# Altium PCB PCB1.PcbDoc
Units mil, origin at the board's own origin, x right, y up, seen from the top; angles counter-clockwise.
Board outline 1730 x 750 mil, 6 copper layers (Top Layer, Signal Layer Top, Signal Layer Down, VCC, GND, Bottom Layer), stack 32.112 mil thick; 30 components, 44 nets, 163 pads, 68 vias.
Unrouted connection lines stored in the file: 1.
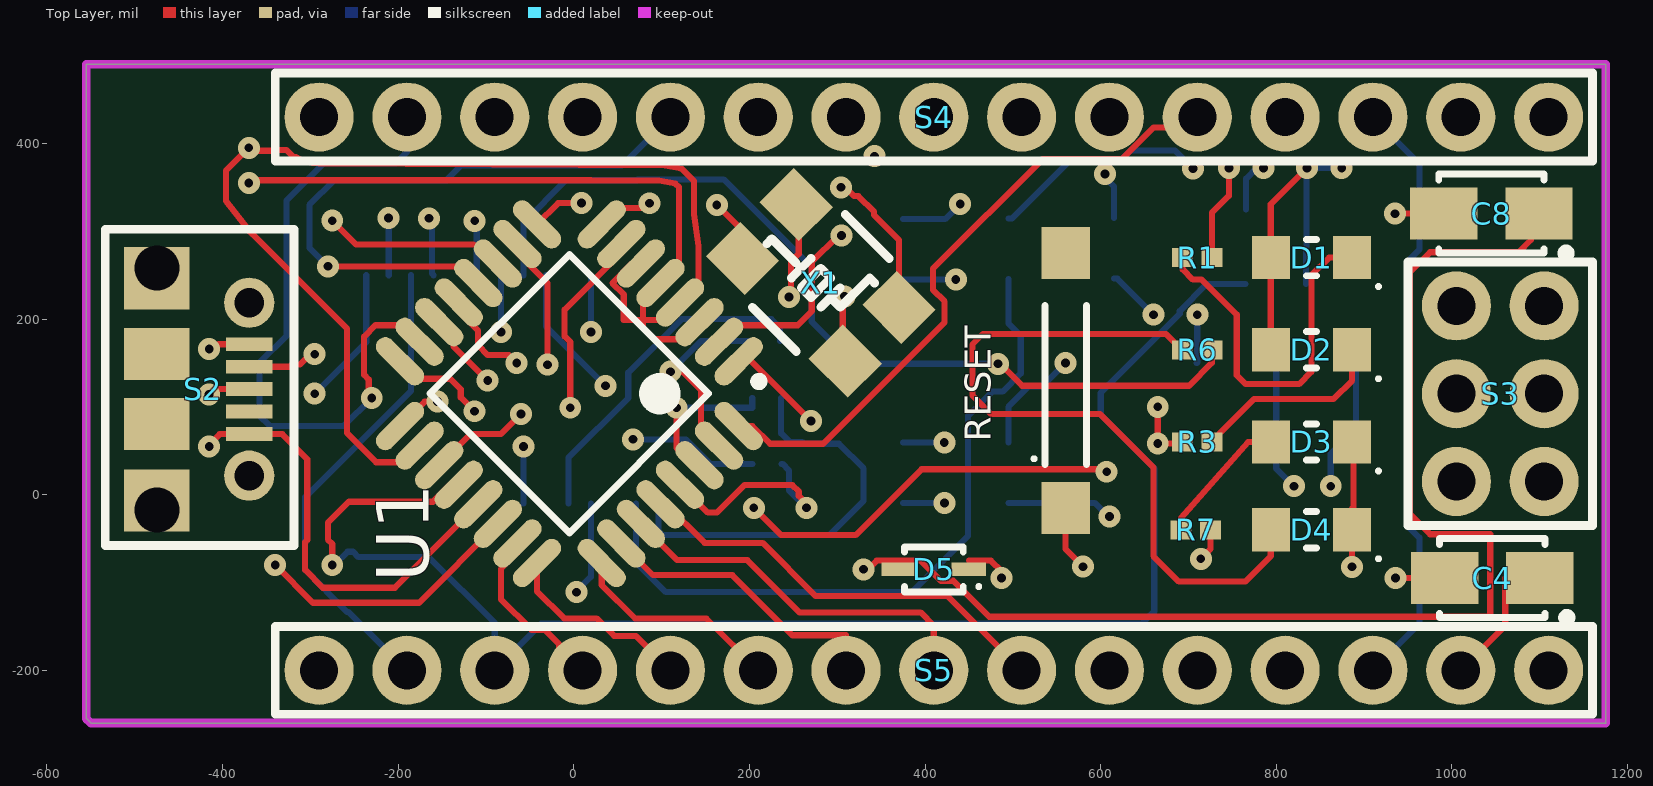
[diagram p0: Top Layer view]
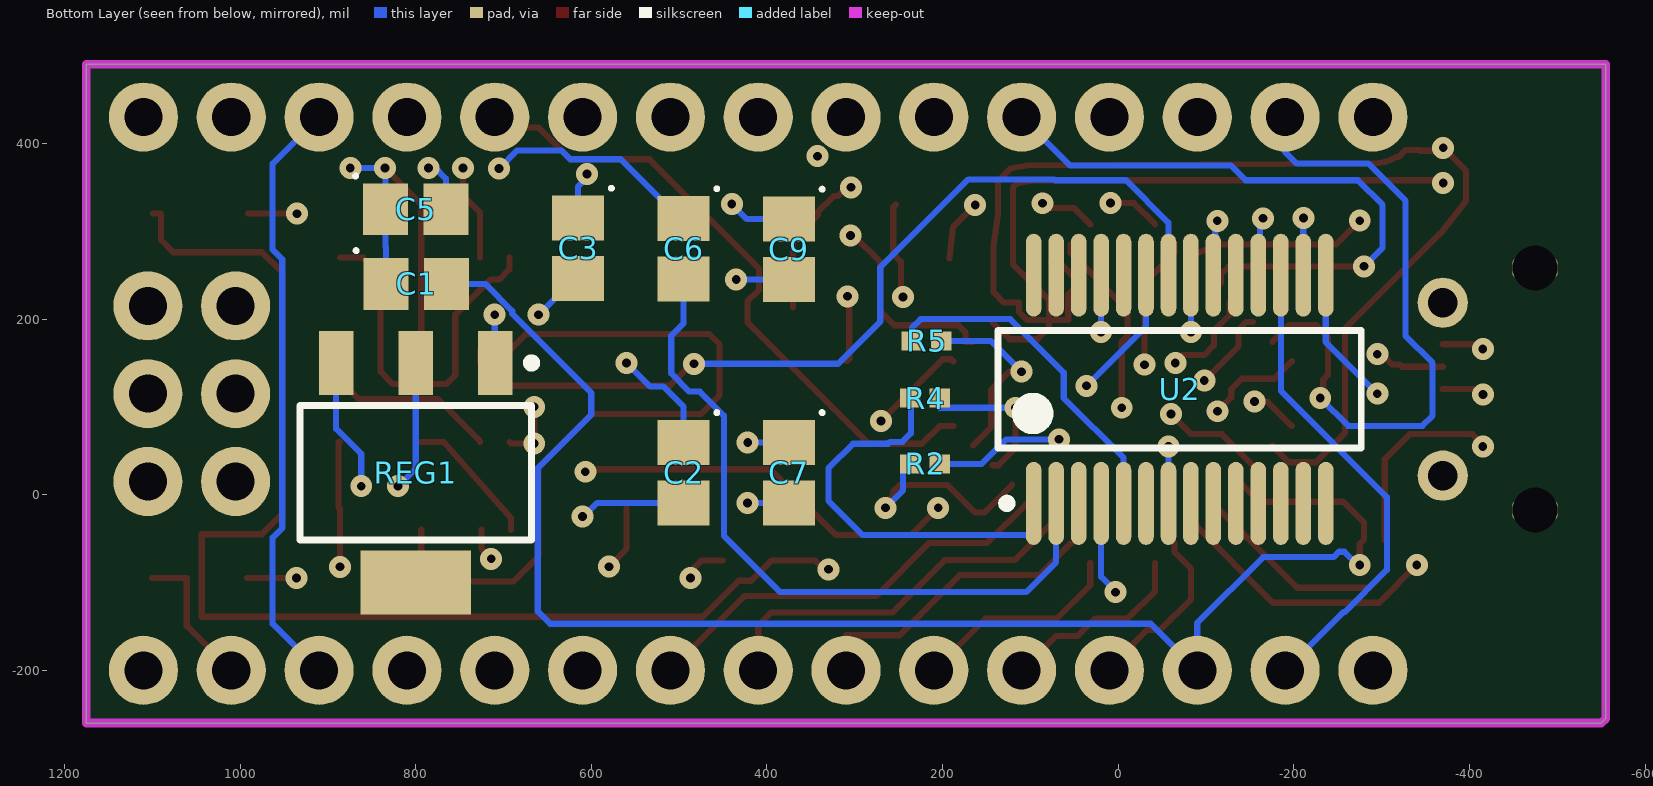
[diagram p1: Bottom Layer view, seen from below]
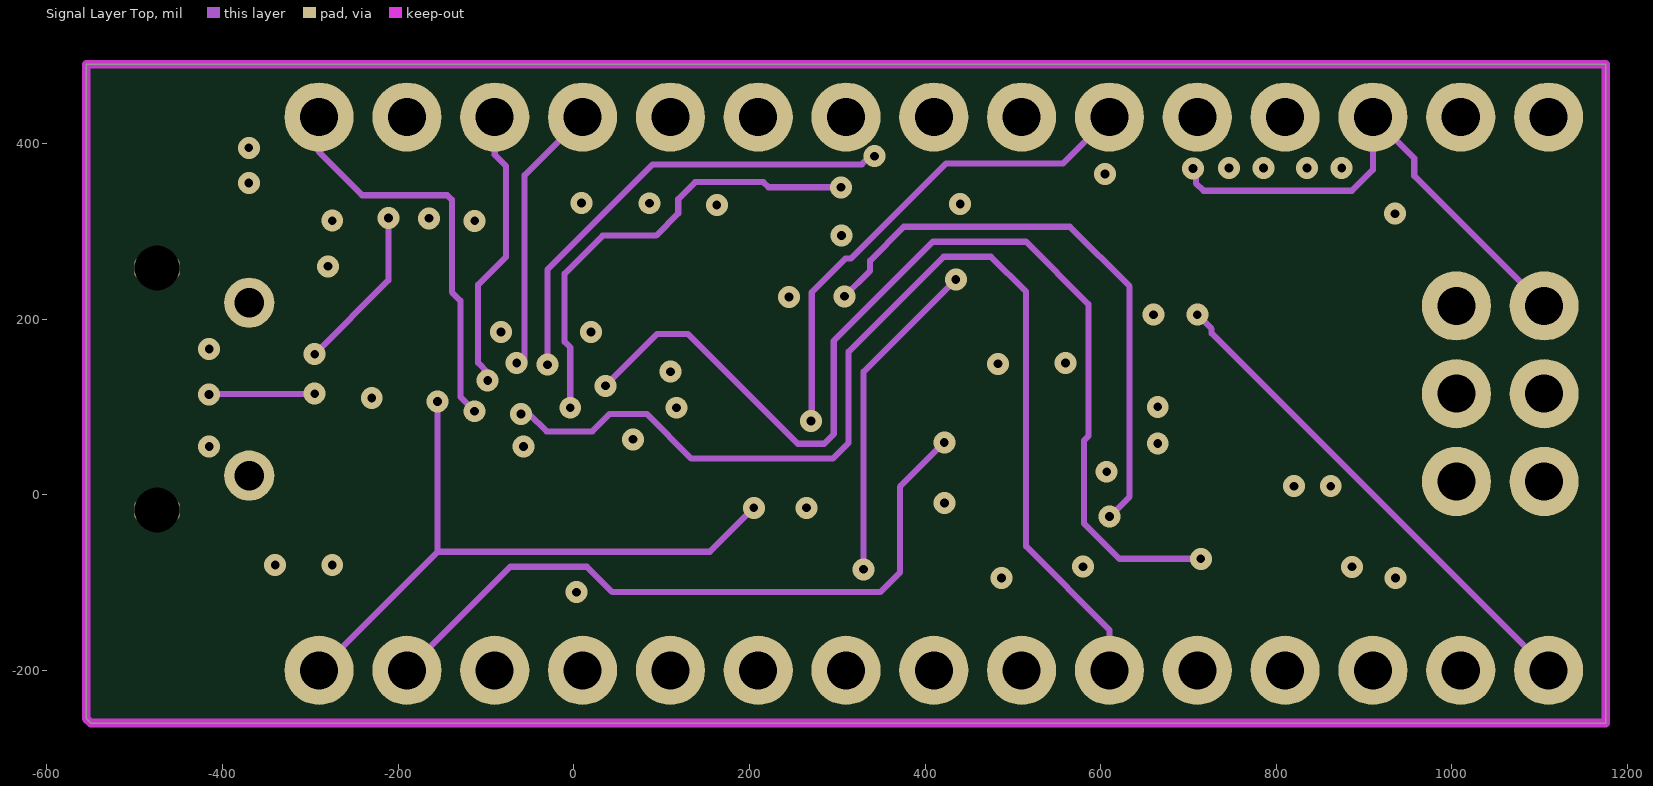
[diagram p2: Signal Layer Top]
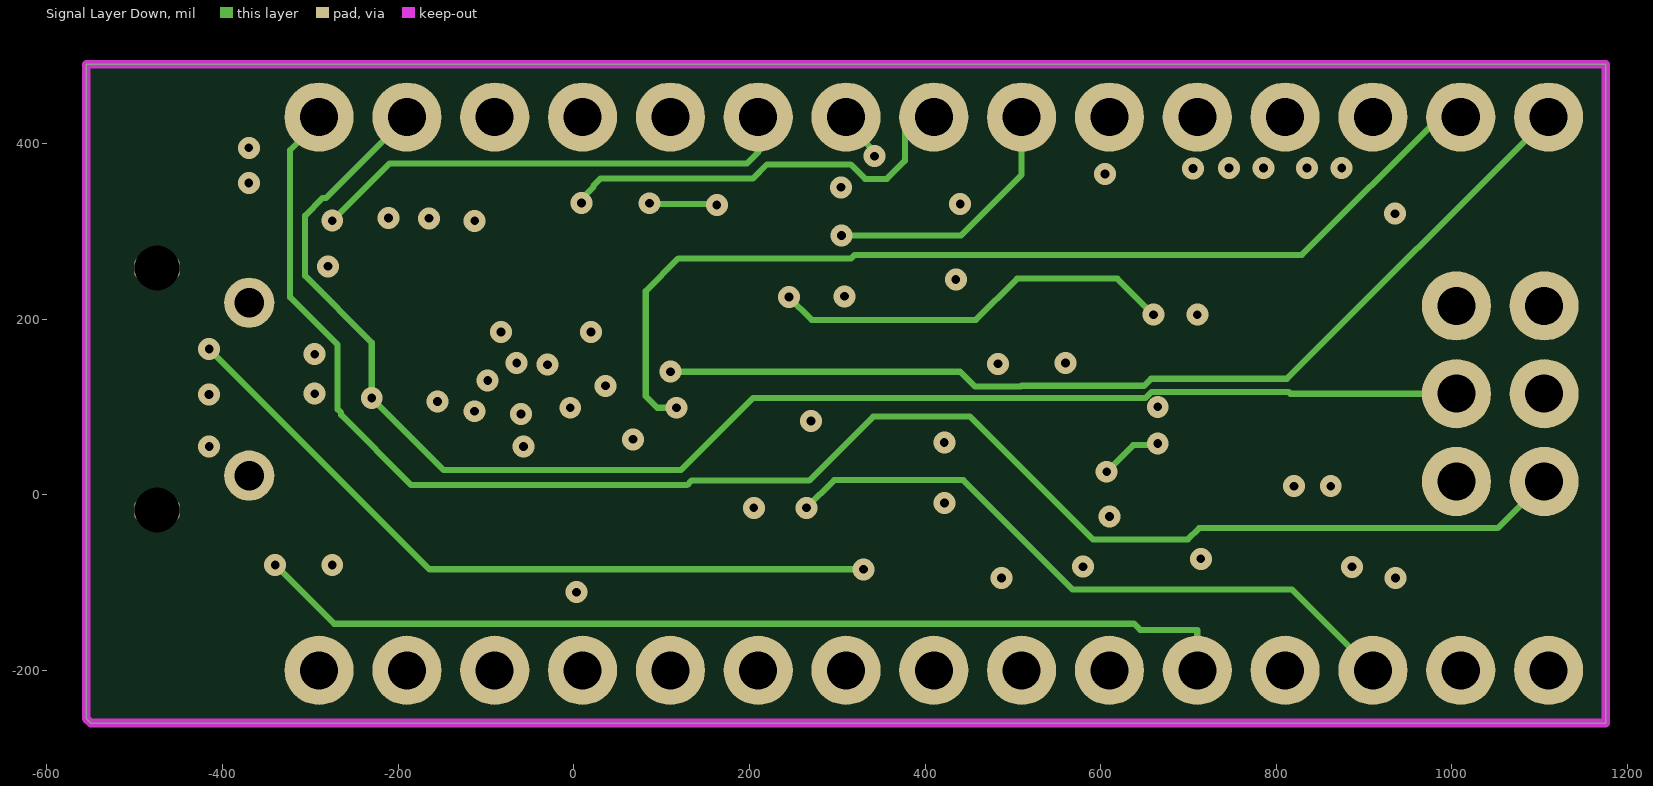
[diagram p3: Signal Layer Down]
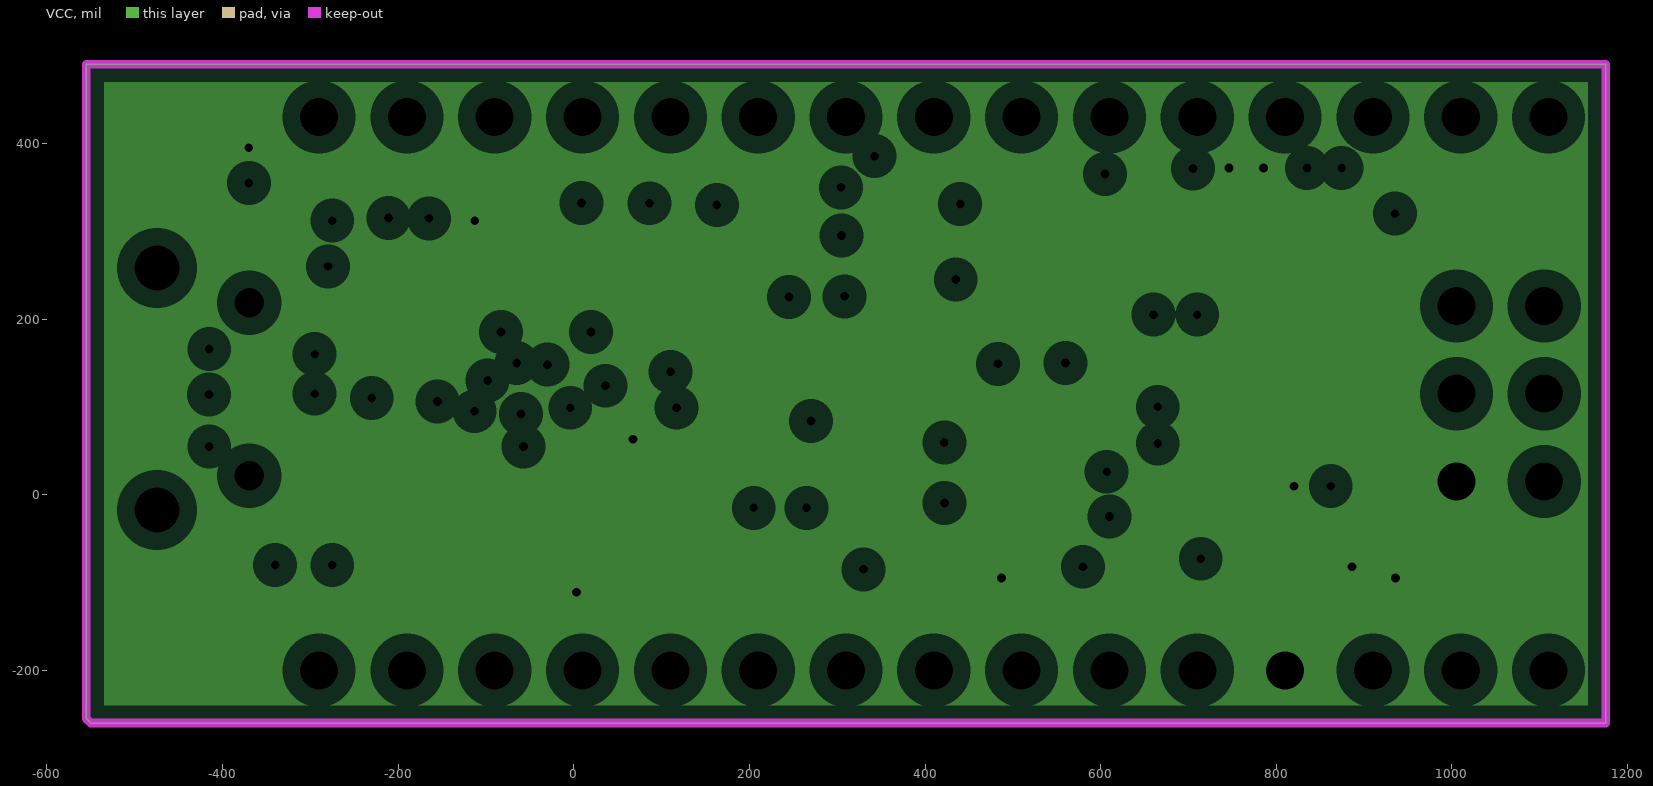
[diagram p4: VCC, clearances drawn from the general rule]
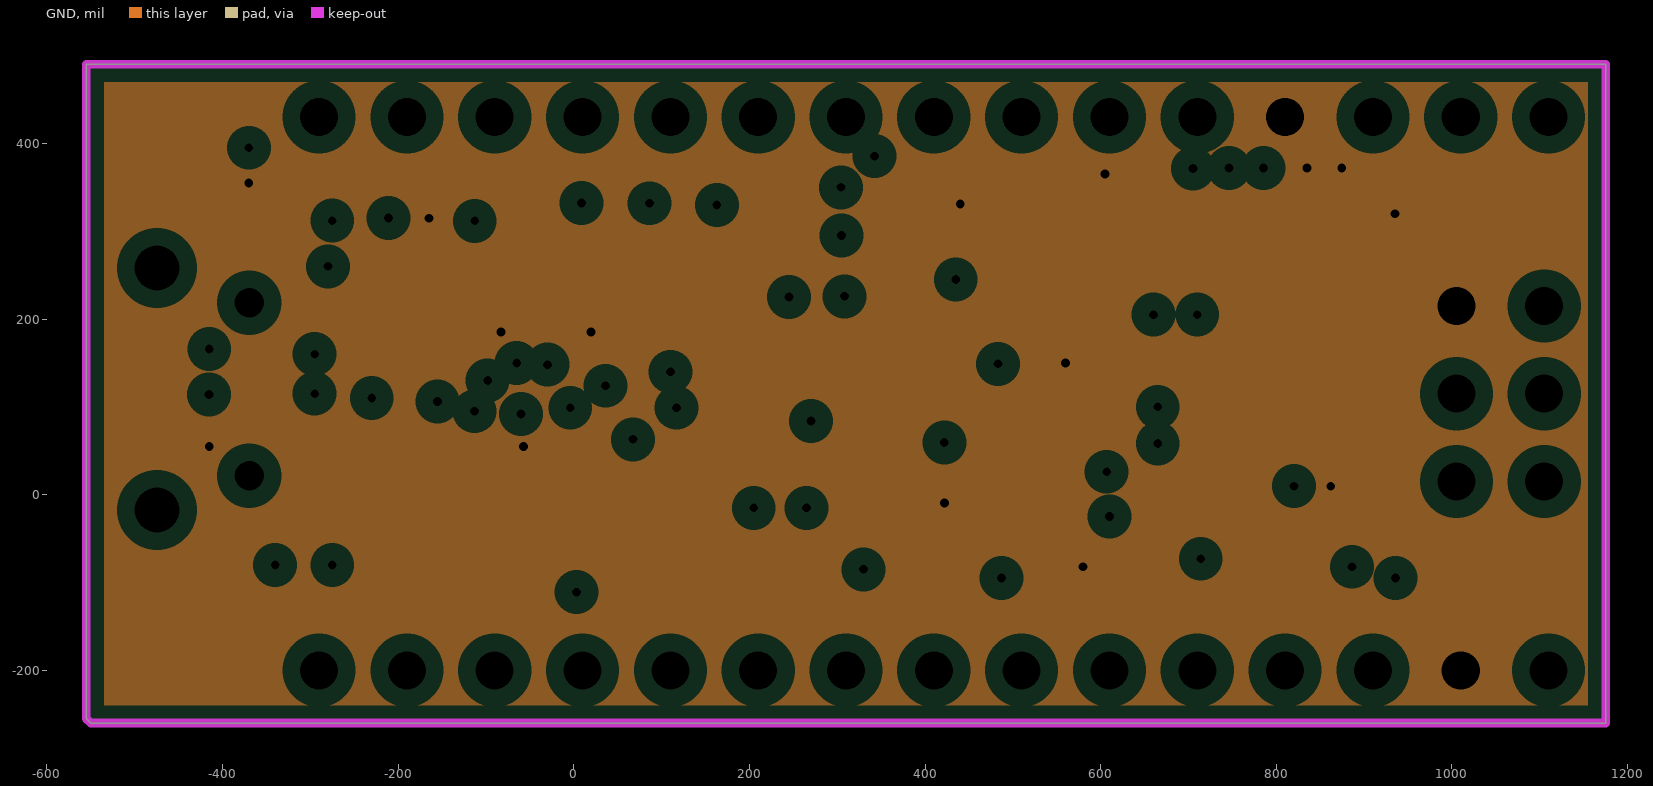
[diagram p5: GND, clearances drawn from the general rule]

## Layer stack, top to bottom
Top Solder: solder mask 0.4, Solder Resist, Dk 3.5
Top Layer: signal copper 1.378
Dielectric 1: prepreg 2.8, PP-006, Dk 4.1
Signal Layer Top: signal copper 1.378
Dielectric 2: prepreg 2.8, PP-006, Dk 4.1
Signal Layer Down: signal copper 1.4
Dielectric 3: dielectric 12.6, FR-4, Dk 4.8
VCC: plane copper 1.378, net +5
Dielectric 5: prepreg 2.8, PP-006, Dk 4.1
GND: plane copper 1.378, net GND
Dielectric 4: prepreg 2.8, PP-006, Dk 4.1
Bottom Layer: signal copper 1.4
Bottom Solder: solder mask 0.4, Solder Resist, Dk 3.5

## Board outline
1175,-260 -550,-260 -555,-255 -555,490 1175,490

## Design rules (kind name [scope] priority, off if disabled: settings)
Clearance [All] p1: gap=7 ignorepadtopadclearanceinfootprint=TRUE except(1: Arc-SMDPad Arc-THPad Arc-Via Arc-Fill Arc-Poly Arc-Region Track-SMDPad Track-THPad Track-Via Track-Fill Track-Poly Track-Region; 4: Arc-Arc Arc-Track Arc-Text Arc-Hole Track-Track Track-Text Track-Hole; 10: Text-Text Text-Hole)
PlaneClearance [All] p1: clearance=20
PlaneConnect [All] p1: planeconnectstyle=Relief reliefexpansion=20 reliefentries=4 reliefconductorwidth=10 reliefairgap=10
PolygonConnect [All] p1: connectstyle=Relief reliefconductorwidth=10 reliefentries=4 polygonreliefangle="90 Angle" airgapwidth=10
RoutingVias [All] p1: holewidth=10 width=25 viastyle="Through Hole" minholewidth=10 minwidth=25 maxholewidth=10 maxwidth=25
SolderMaskExpansion [All] p1: expansion=4 istentingtop=FALSE
SupplyNets "Schematic Supply Nets_4" [InNet('VUSB')] p1: voltage=0.000
SupplyNets "Schematic Supply Nets_3" [InNet('3V3')] p2: voltage=0.000
SupplyNets "Schematic Supply Nets_2" [InNet('VCC')] p3: voltage=0.000
SupplyNets "Schematic Supply Nets_1" [InNet('GND')] p4: voltage=0.000
SupplyNets "Schematic Supply Nets" [InNet('+5')] p5: voltage=0.000
Width [All] p1: maxlimit=10 minlimit=7 preferedwidth=7 minimp=50.000000 maximp=50.000000 favimp=50.000000
28 further rules are at their usual default settings.

## Components (designator, comment, footprint, x,y, rotation, side; value= is the part's Value field where it differs from the comment)
C1 "100nF Ceramic Multilayer Capacitor_1" CAPCP2012X09N 799.45,240 r180 bottom
C2 "C0805C180J5GACTU" CAPCP2012X09N 495,25 r270 bottom
C3 "C0805C180J5GACTU" CAPCP2012X09N 615,280.55 r270 bottom
C4 "Capacitor SMT Tantalum" "CASE A - 3216X18" 1045.87,-95 r180 top value=4.7µF
C5 "100nF Ceramic Multilayer Capacitor_1" CAPCP2012X09N 800,325 r180 bottom
C6 "100nF Ceramic Multilayer Capacitor_1" CAPCP2012X09N 495,280 r270 bottom
C7 "100nF Ceramic Multilayer Capacitor_1" CAPCP2012X09N 375,25 r270 bottom
C8 "Capacitor SMT Tantalum" "CASE A - 3216X18" 1045,320 r180 top value=4.7µF
C9 "100nF Ceramic Multilayer Capacitor_1" CAPCP2012X09N 375,279.45 r270 bottom
D1 "Kingbright Blue LED, 60 mcd 120 ° 0805" LED1913X12NBLUE 840,270 r180 top
D2 "Kingbright Red LED, 100 mcd 120 ° 0805" LED1913X12NRED 840,165 r180 top
D3 "Kingbright Red LED, 100 mcd 120 ° 0805" LED1913X12NRED 840,60 r180 top
D4 "Kingbright Red LED, 100 mcd 120 ° 0805" LED1913X12NRED 840,-40 r180 top
D5 "Panasonic DB2J20900L Schottky Diode, 0.5A, 20V, 2.4ns, 2-Pin SMini2 F5 B" DIOM1712X07N 410,-85 r180 top
R1 "RC0402JR-070RL" RESC1005X40X25NL05T10 710,270 r180 top value=330
R2 "RC0402JR-070RL" RESC1005X40X25NL05T10 220,35 r180 bottom value=1K
R3 "RC0402JR-070RL" RESC1005X40X25NL05T10 710,60 r180 top value=330
R4 "RC0402JR-070RL" RESC1005X40X25NL05T10 220,110 r180 bottom value=1K
R5 "RC0402JR-070RL" RESC1005X40X25NL05T10 218.27,175 r180 bottom value=1K
R6 "RC0402JR-070RL" RESC1005X40X25NL05T10 710,165 r180 top value=330
R7 "RC0402JR-070RL" RESC1005X40X25NL05T10 708.27,-40 r180 top value=330
REG1 "LM1117MP-5.0/NOPB, Low Dropout Voltage Regulator, 1.5A, 5 V ±1%, 4-Pin SOT-223" SOT230P700X180-4N 800,25 r270 bottom
RESET "Button Tactile Switch, NO 0.05 A 0.8mm" Button8014X17N 560,125 r90 top (schematic designator S1)
S2 "NewMolex Right Angle SMT Female Type B Micro USB Connector, 30 V ac, 1.8A" MicroUSB -369.57,168.58 r270 top
S3 "Programming Headers Dual Row" "ISP HEADER" 550,-680 r90 top
S4 "connector;str header;single row;.1 cont centers;.095 tail;gold or gtx;36 contact" Header 1110,430 r180 top
S5 "connector;str header;single row;.1 cont centers;.095 tail;gold or gtx;36 contact" Header 1110,-200 r180 top
U1 "ATMEGA328P-AU" TQFP80P900X900X120-32N -5,115 r225 top
U2 "FT232RL, Universal Asynchronous Receiver & Transmitter 3MBd, 28-Pin, SSOP" SOP65P780X200-28N -70,120 r90 bottom
X1 "Aker 16MHz Crystal SMT" "Aker S5C Crystal" 370.33,213.3 r315 top value=16MHz

## Footprints (in the part's own frame and the unit in brackets; to place one, negate y for a bottom-side part, rotate by r counter-clockwise, add the part's x,y. Pads: shape width x height; smd on the part's side, far side on the other; paste and mask are expansions set on the pad)
"Aker S5C Crystal" [mm]
  rect 1.6x1.4 smd: 1(0,0) 2(-4.2,0) 3(0,-2.2) 4(-4.2,-2.2)
  round 0.254 on Top Overlay: 5(-3,-2.4)
  silkscreen extent -4,-3 -1,0.8, body extent -4.7,-2.8 0.5,0.6, height 1
Button8014X17N [mm] "Chip Inductor, 2-Leads, Body 8.00x1.40mm, IPC Medium Density"
  rect 1.5x1.4 smd: 1(-3.556,0) 2(3.81,0)
  silkscreen extent -2.3,-0.6 2.3,0.96, body extent -3.79,-1.92 4.21,1.78, height 2.5
CAPCP2012X09N [mm] "Chip Capacitor, 2-Leads, Body 2.00x1.25mm, IPC Medium Density"
  rect 1.3x1.5 smd: 1(-0.875,0) 2(0.875,0)
  silkscreen extent -1.79,0.91 -1.69,1.01, body extent -1.05,-0.57 0.95,0.68, height 0.78
"CASE A - 3216X18" [mm] "Molded Capacitor, 2-Leads, Body 3.2x1.6mm, IPC Medium Density"
  rect 1.95x1.5 smd: 1(-1.375,0) 2(1.375,0)
  silkscreen extent -2.28,-1.14 1.52,1.27, body extent -1.52,-0.76 1.65,0.84, height 1.77
DIOM1712X07N [mm] "Molded Diode, 2-Leads, Body 1.70x1.25mm, IPC Medium Density"
  rect 1x0.4 smd: 1(-1.016,0) 2(1.016,0)
  silkscreen extent -1.35,-0.65 0.85,0.65, body extent -0.9,-0.45 0.9,0.45, height 0.8
Header [mm] "SIL Header"
  round 2 hole 1.1: 1(0,0) 2(2.54,0) 3(5.08,0) 4(7.62,0) 5(10.16,0) 6(12.7,0) 7(15.24,0) 8(17.78,0) 9(20.32,0) 10(22.86,0) 11(25.4,0) 12(27.94,0) 13(30.48,0) 14(33.02,0) 15(35.56,0)
  silkscreen extent -1.27,-1.27 36.83,1.27, body extent -1.33,-1.35 36.93,1.35, height 8.6
"ISP HEADER" [mm] "SIL Header for programming"
  round 2 hole 1.1: 1(17.653,-14.097) 2(17.653,-11.557) 3(20.193,-14.097) 4(20.193,-11.557) 5(22.733,-14.097) 6(22.733,-11.557)
  silkscreen extent 16.38,-15.49 24,-10.16, body extent 16.38,-15.37 24,-10.29, height 8
LED1913X12NBLUE [mm] "LED 2-Leads, Body 1.90x1.32mm, IPC Medium Density"
  rect 1.1x1.25 smd: 1(-1.175,0) 2(1.175,0)
  silkscreen extent -1.99,-0.53 0.15,0.89, body extent -1,-0.62 1.02,0.62, height 1.1
LED1913X12NRED [mm] "LED 2-Leads, Body 1.90x1.32mm, IPC Medium Density"
  rect 1.1x1.25 smd: 1(-1.175,0) 2(1.175,0)
  silkscreen extent -1.99,-0.53 0.15,0.89, body extent -1.02,-0.43 1.04,0.47, height 0.85
MicroUSB [mm] "MicroUSB  Molex 5Pin"
  rect 0.4x1.35 smd: 1(-0.07,0) 2(0.58,0) 3(1.23,0) 4(1.88,0) 5(2.53,0)
  rrect50% 0.6x1.3 hole 1.3: ""(-2.27,-2.667) ""(-2.27,-2.667) ""(4.73,-2.667)
  rect 1.8x1.9 smd: ""(-1.98,-2.678) ""(4.45,-2.678)
  round 1.45 hole 0.85: ""(-1.27,0) ""(3.73,0)
  rect 1.5x1.9 smd: ""(0.218,-2.678) ""(2.242,-2.678)
  silkscreen extent -3.39,-4.17 5.75,1.3, body extent -2.83,-5.32 5.37,0.11, height 2.68
RESC1005X40X25NL05T10 [mm] "Chip Resistor, 2-Leads, Body 1.00x0.50mm, IPC Medium Density"
  rect 0.6x0.55 smd: 1(-0.425,0) 2(0.425,0)
  body extent -0.53,-0.27 0.53,0.28, height 0.4
SOP65P780X200-28N [mm] "SOP, 28-Leads, Body 10.20x5.30mm, Pitch 0.65mm, IPC Medium Density"
  oval 2.4x0.45 smd: 1(-3.3,4.225) 2(-3.3,3.575) 3(-3.3,2.925) 4(-3.3,2.275) 5(-3.3,1.625) 6(-3.3,0.975) 7(-3.3,0.325) 8(-3.3,-0.325) 9(-3.3,-0.975) 10(-3.3,-1.625) 11(-3.3,-2.275) 12(-3.3,-2.925) 13(-3.3,-3.575) 14(-3.3,-4.225) 15(3.3,-4.225) 16(3.3,-3.575) 17(3.3,-2.925) 18(3.3,-2.275) 19(3.3,-1.625) 20(3.3,-0.975) 21(3.3,-0.325) 22(3.3,0.325) 23(3.3,0.975) 24(3.3,1.625) 25(3.3,2.275) 26(3.3,2.925) 27(3.3,3.575) 28(3.3,4.225)
  silkscreen extent -3.42,-5.25 1.7,5.25, body extent -3.91,-5.1 3.91,5.1, height 2
SOT230P700X180-4N [mm] "SOT223, 4-Leads, Body 6.50x7.00mm (avg), Pitch 2.30mm, IPC Medium Density"
  rect 1.85x1 smd: 1(-3.175,2.3) 2(-3.175,0) 3(-3.175,-2.3)
  rect 1.85x3.2 smd: 4(3.175,0)
  silkscreen extent -3.3,-3.35 1.95,3.47, body extent -3.8,-3.12 3.29,3.38, height 1.65
TQFP80P900X900X120-32N [mm] "TQFP, 32-Leads, Body 7.00x7.00mm, Pitch 0.80mm, IPC Medium Density"
  oval 1.75x0.55 smd: 1(-4.125,2.8) 2(-4.125,2) 3(-4.125,1.2) 4(-4.125,0.4) 5(-4.125,-0.4) 6(-4.125,-1.2) 7(-4.125,-2) 8(-4.125,-2.8) 17(4.125,-2.8) 18(4.125,-2) 19(4.125,-1.2) 20(4.125,-0.4) 21(4.125,0.4) 22(4.125,1.2) 23(4.125,2) 24(4.125,2.8)
  oval 0.55x1.75 smd: 9(-2.8,-4.125) 10(-2,-4.125) 11(-1.2,-4.125) 12(-0.4,-4.125) 13(0.4,-4.125) 14(1.2,-4.125) 15(2,-4.125) 16(2.8,-4.125) 25(2.8,4.125) 26(2,4.125) 27(1.2,4.125) 28(0.4,4.125) 29(-0.4,4.125) 30(-1.2,4.125) 31(-2,4.125) 32(-2.8,4.125)
  silkscreen extent -4.25,-2.85 2.85,3.75, body extent -4.44,-4.5 4.56,4.5, height 1.6

## Part data
C1 C5 C6 C7 C9: "AVX 0805 Standard 100nF Ceramic Multilayer Capacitor, 50 V dc X7R Dielectric ±10% SMD", Capacitance=100nF, Manufacturer=AVX, Package=0805, Voltage=50V, Creator="Ritesh Kanjee", Datasheet URL=http://za.rs-online.com/web/p/ceramic-multilayer-capacitors/4646688/, Date Created="18 February 2015", RS Stock No.=464-6688
C2 C3: library part "18pF Ceramic Multilayer Capacitor, 50 V dc C0G Dielectric ±5% SMD", "18pF Ceramic Multilayer Capacitor, 50 V dc C0G Dielectric ±5% SMD", Capacitance=18pF, Manufacturer=Kemet, Package=0805, Voltage=50V, Creator="Ritesh Kanjee", Datasheet URL=http://za.rs-online.com/web/p/ceramic-multilayer-capacitors/6480935/?searchTerm=C0805C180J5GACTU&relevancy-data=636F3D3226696E3D4931384E4B6E6F776E41734D504E266C753D656E266D6D3D6D61746368616C6C7061727469616C26706D3D5E5B5C707B4C7D5C707B4E647D2D2C2F255C2E5D2B2426706F3D313326736E3D592673743D4D414E5F504152545F4E554D4245522677633D424F5448267573743D4330383035433138304A35474143545526, Date Created="18 February 2015", RS Stock No.=648-0935
C4 C8: library part "4.7µF Tant RS 496-3545", "Capacitor,tantalum,SMT,16V,4.7uF,10%,A-case", Package=3216-18, Tolerance=10%, Voltage=16V, ComponentLink1Description="Supplier Website", ComponentLink1URL=http://za.rs-online.com/web/search/searchBrowseAction.html?method=getProduct&R=4963545, ComponentLink2Description="RS Data sheet", ComponentLink2URL=http://docs-europe.origin.electrocomponents.com/webdocs/04ed/0900766b804ed4cc.pdf, LatestRevisionDate=28-April-2010, Part Originator="H Theron", Publisher=DPSS, RS Stock Nr.=496-3545
D1: Color=Blue, Forward Voltage=3.2V, Manufacturer=KingBright, Manufacturer Part No.=KP-2012PBC-A, Creator="Ritesh Kanjee", Datasheet URL=http://za.rs-online.com/web/p/visible-leds/4663784/, Date Created="18 February 2015", RS Stock No.=466-3784
D2 D3 D4: Color=RED, Forward Voltage=1.85V, Manufacturer=KingBright, Manufacturer Part No.=KP-2012SRC-PRV, Creator="Ritesh Kanjee", Datasheet URL=http://za.rs-online.com/web/p/visible-leds/4663813/, Date Created="18 February 2015", RS Stock No.=466-3813
D5: library part "Schottky Diode, 0.5A, 20V, 2.4ns, 2-Pin SMini2 F5 B", Manufacturer=Panasonic, Manufacturer Part No.=DB2J20900L, Maximum Continuous Forward Current=0.5A, Peak Reverse Repetitive Voltage=20V, Created By="R Kanjee", Datasheet=http://docs-europe.electrocomponents.com/webdocs/1398/0900766b813986b3.pdf, Date Created="1 March 2015", RS Stock No.=713-2703
R1 R2 R3 R4 R5 R6 R7: library part CMP-1011-00001-2, Manufacturer="Yageo / Phycomp", Part Number=RC0402JR-070RL
REG1: library part LM1117MP-5.0, Manufacturer="Texas Instruments", Maximum Input Voltage=15V, Output Voltage=5V, Supply Current=1.5Amps, Created By="R Kanjee", Datasheet URL=http://za.rs-online.com/web/p/low-dropout-voltage-regulators/5339583/, Date Created="26 February 2015", RS Stock No.=533-9583
RESET: Manufacturer="C & K", Manufacturer Part No.=B3F1000, Creator="R Kanjee", Date Created="25 February 2015", RS Stock No.=516-255, State="Normaly Open"
S2: library part "Micro USB Connector, 30 V ac, 1.8A", Manufacturer=Molex, Manufacturer Part No.=105017-0001, Max Current=1.8A, Max Voltage=30V, Creator="R Kanjee", Datasheet URL=http://za.rs-online.com/web/p/micro-usb-connectors/8486764/, Date Created="28 February 2015", RS Stock No=848-6764
S3: library part "Programming ISP, Programming Headers Dual Row", Current Rating="3Amps Continuous", Manufacturer=FCI, Manufacturer Part No.=68000-236HLF, Created By="R Kanjee", Date Created="1 March 2015", RS Stock No.=2509565626
S4 S5: library part "Single row; PCB headers", Current Rating="3Amps Continuous", Manufacturer=FCI, Manufacturer Part No.=68000-236HLF, Created By="R Kanjee", Date Created="1 March 2015", RS Stock No.=2509565626
U1: "ATMEGA328P-AU, 8 bit AVR Microcontroller 20MHz 1 kB, 32 kB Flash, 2 kB RAM, I2C 32-Pin TQFP", Company="Lumina Inova", Created By="Ritesh Kanjee", Datasheet URL=http://docs-europe.electrocomponents.com/webdocs/0db4/0900766b80db4deb.pdf, Date Created="14 February 2015", RS Stock No.=696-3092
U2: library part "FT232RL USB to UART, Universal Asynchronous Receiver & Transmitter 3MBd, 28-Pin, SSOP", Manufacturer="FTDI Chip", Manufacturer Part No.=FT232RL, Creator="R Kanjee", Date Created="03 March 2015", Pin Count=28, RS Stock No.=406-580
X1: library part "Aker  C5S-16.000-12-3030-X", "Aker S5C SMT Crystal", Frequency Stability=+/-30ppm, Load Capacitance=12pF, Manufacturer=Aker, Manufacturer Part #=C5S-16.000-12-3030-X, Package="3.2x5mm SMD", Creator="R Kanjee", HelpURL=http://za.rs-online.com/web/p/crystal-units/6719488/, RS="RS 671-9488", RS Stock Nr.=671-9488, Supplier=RS

## Via types
v1: diameter 25, hole 10, Top Layer to Bottom Layer, 68 vias

## Nets (pads, with @x,y where several pads share a name; then routed paths per layer and width w, separated by ;. In a path a pad name is that pad's centre, name@x,y a point inside that pad or via, vN(x,y) a via of type N, cw(c..) or ccw(c..) an arc to the next point about the centre after c; other vN are vias at no path point)
3V3: C7.1 S5.14 U2.17 | length 1396.6
  Signal Layer Top w7: S5.14 -72.08,-82.08 15,-82.08 43.92,-111 349,-111 371.34,-88.66 371.34,8.79 v1(422,59.45)
  Bottom Layer w7: S5.14 -256.33,-133.67 -258.1,-133.67 -306,-85.77 -306,-2.77 -185.16,118.07 U2.17 ; C7.1 v1(422,59.45)
+5: C4.2 C5.2 D3.1 D4.1 D5.1 R1.1 R2.2 REG1.2 S3.2 S5.4 U1.4 U1.6 U1.18 U2.4 U2.20 | length 2223.3
  Top Layer w7: U1.18 -194.35,37 -225,37 -258.09,70.09 -258.09,189.09 -366,297 -366.1,297 -369.32,300.22 -396,334.23 -396,369 v1(-370,395) -366.56,391.56 -343.5,391.56 -342.45,392.62 -327.38,392.62 -319.32,384.55 -317.01,384.55 ccw(c-290,430) -290.29,377.13 103.76,375 122.86,371.18 136.92,357.12 136.92,319.23 142,283.13 142,230.26 130.44,218.7 U1.4 113,218.7 113,208 104,199 57,199 57,228 44.03,240.98 66.29,263.24 U1.6 ; 450,-75 475,-75 487.19,-87.19 v1(487.19,-95) ; R1.1 726.73,321 746,340.27 v1(746,372) ; v1(886.26,-82.11) D4.1 886.26,-16 888,-14.26 888,60 D3.1 ; v1(935.85,-95) C4.2
  Bottom Layer w7: v1(-112.77,311.85) -110.44,309.52 -110.44,251.97 U2.20 ; v1(3,-111) 3,-110.08 19.57,-93.51 U2.4 ; v1(67.54,63) 127.54,63 155.54,35 R2.2 ; C5.2 765.55,360 777.58,372.03 v1(785.55,372.03) ; REG1.2 800,29.67 v1(820,9.67)
A0: S5.12 U1.23 | length 215.4
  Top Layer w7: U1.23 -64.16,-65.65 -83,-84.49 -83,-119 -48,-154 -33,-154 -17,-170 -17,-200 S5.12
A1: S5.11 U1.24 | length 221.4
  Top Layer w7: U1.24 -41.89,-110 -11.05,-140.84 26.07,-140.84 46,-160.77 70.77,-160.77 S5.11
A2: S5.10 U1.25 | length 243.4
  Top Layer w7: U1.25 31.89,-102.89 70,-141 151,-141 S5.10
A3: S5.9 U1.26 | length 339.1
  Top Layer w7: U1.26 90.23,-91.59 180.57,-91.59 248.98,-160 310,-160 S5.9
A4: S5.8 U1.27 | length 432.5
  Top Layer w7: U1.27 117.77,-74.59 197.57,-74.59 256.98,-134 395,-134 410,-149 S5.8
A5: S5.7 U1.28 | length 489.6
  Top Layer w7: U1.28 104.97,-10.97 149,-55 215,-55 275.27,-115.27 425.27,-115.27 S5.7
A6: S5.6 U1.19 | length 1373.2
  Top Layer w7: U1.19 -117.81,69 -83,69 v1(-60,92)
  Signal Layer Top w7: v1(-60,92) -51,92 -31,72 21,72 41,92 83.07,92 134.07,41 295,41 313,59 313,162.92 421.08,271 475,271 515,231 515,-59 610,-154 S5.6
A7: S5.5 U1.22 | length 1435.2
  Top Layer w7: v1(-340,-80) -297,-123 -176.19,-123 U1.22
  Signal Layer Down w7: v1(-340,-80) -273,-147 638,-147 645,-154 710,-154 S5.5
AREF: C1.2 S5.13 U1.20 | length 1767
  Top Layer w7: v1(-275,-80) -275,-56.06 -280,-51.06 -280,-32 -256,-8 -160.41,-8 -141.11,11.3 U1.20
  Bottom Layer w7: v1(-275,-80) -272.47,-80 -257.47,-65 -251.27,-65 -245.27,-71 -165,-71 -90,-146 S5.13 -37,-147 647,-147 661,-133 661,29.96 600,90.96 600,115.96 689.98,205.94 689.98,209.02 720.96,240 C1.2
D0/Rx: R4.2 S4.2 U1.30 | length 1347.9
  Top Layer w7: v1(117,99) 117,53 136.43,33.57 U1.30
  Signal Layer Down w7: v1(117,99) 95,99 82,112 82,231.9 119.1,269 315.77,269 319.77,273 829,273 986,430 S4.2
  Bottom Layer w7: v1(117,99) 203.27,99 R4.2
D1/Tx: R5.2 S4.1 U1.31 | length 1355.6
  Top Layer w7: v1(110,140) 124,140 145,119 145,76.35 U1.31
  Signal Layer Down w7: v1(110,140) 440,140 457,123 509,123 510,124 649.4,124 657.4,132 812,132 S4.1
  Bottom Layer w7: v1(110,140) 145,175 R5.2
D2: S4.5 U1.32 | length 739.1
  Top Layer w7: U1.32 203.46,78.11 223.57,58 284,58 422.21,196.21 422.21,220.12 409,233.33 409,257.23 533.77,382 624.04,382 660.13,418.09 698.09,418.09 S4.5
D3: S4.6 U1.1 | length 680.7
  Top Layer w7: U1.1 190.16,154.26 199.74,154.26 v1(270,84)
  Signal Layer Top w7: v1(270,84) 271,85 271,230.3 309.7,269 315.77,269 423.77,377 557,377 S4.6
D4: S4.7 U1.2 | length 528.1
  Top Layer w7: U1.2 174,174.16 174,185 182,193 255,193 271.01,209.01 271.01,265.01 301,295 v1(305,295)
  Signal Layer Down w7: v1(305,295) 440.77,295 510,364.23 S4.7
D5: S4.8 U1.9 | length 549.3
  Top Layer w7: U1.9 -17.67,332 v1(8.97,332)
  Signal Layer Down w7: v1(8.97,332) 8.97,336.87 22.31,350.21 22.31,351.98 30.33,360 204.04,360 220.04,376 315.19,376 331.71,359.48 356.38,359.48 377,380.1 377,430 S4.8
D6: S4.9 U1.10 | length 743.9
  Top Layer w7: U1.10 -64.16,275.38 -30,241.22 v1(-30,148)
  Signal Layer Top w7: v1(-30,148) -30,256.26 89.74,376 328.13,376 337.61,385.48 v1(342.48,385.48)
  Signal Layer Down w7: S4.9 310,422.83 342.48,390.35 v1(342.48,385.48)
D7: S4.10 U1.11 | length 769.5
  Top Layer w7: v1(-275,312) -248,285 -114.28,285 -86.43,273.38 U1.11
  Signal Layer Down w7: v1(-275,312) -210,377 197,377 210,390 S4.10
D8: S4.11 U1.12 | length 716.2
  Top Layer w7: v1(-280,260) -279.73,259.73 -125.73,259.73 -117,251 -117,240.97 U1.12
  Bottom Layer w7: v1(-280,260) -301,281 -301,330 -273,358 -145.08,358 -128.08,375 55,375 S4.11
D9: S4.12 U1.13 | length 428.7
  Top Layer w7: U1.13 -127,218.7 -127,204.59 -109,186.59 -109,170 -98,159 -74,159 v1(-65,150)
  Signal Layer Top w7: v1(-65,150) -56,150 -56,364 S4.12
D10: S4.13 U1.14 | length 417.1
  Top Layer w7: U1.14 -145.43,196.43 -137,188 -137,169 v1(-98,130)
  Signal Layer Top w7: v1(-98,130) -98,139 -109,150 -109,239 -77,271 -77,374 -90,387 S4.13
D11/MOSI: S3.4 S4.14 U1.15 | length 2462.2
  Top Layer w7: v1(-230,110) -233.44,113.44 -233.44,131.13 -238.82,136.5 -238.82,180 -225.82,193 -194.35,193 U1.15
  Signal Layer Down w7: S4.14 -282,338 -285.77,338 -306,317.77 -306,249.23 -230,173.23 v1(-230,110) -148,28 122,28 204,110 650.96,110 657.96,117 813.91,117 815.91,115 S3.4
  Bottom Layer w7: v1(-230,110) -261.77,78.23 -346.23,78.23 -358,90 -358,150 -327,181 -327,335 -285,377 -203,377 -190,390 S4.14
D12/MISO: S3.1 S4.15 U1.16 | length 2476.4
  Top Layer w7: U1.16 -177.9,132 -140.75,132 -128.75,120 -128.75,110.75 v1(-113,95)
  Signal Layer Top w7: S4.15 -290,390 -241,341 -144,341 -138.77,335.77 -138.77,230.7 -129,220.94 -129,111.53 -113,95.53 v1(-113,95)
  Signal Layer Down w7: S4.15 -290,425.47 -323,392.47 -323,224.77 -269,170.77 -269,97.23 -265,93.23 -265,91 -185,11 129.04,11 134.04,16 268,16 341,89 451.25,89 591.25,-51 699.23,-51 712.23,-38 1052,-38 S3.1
D13/SCK: R3.2 S3.3 S5.15 U1.17 | length 1386.1
  Top Layer w7: U1.17 -169.9,106 v1(-155,106) ; v1(205,-15) 236,-46 321,-46 396,29 603.96,29 v1(606.85,26.11) ; v1(665,100) v1(665,58.31) 691.58,58.31 R3.2
  Signal Layer Top w7: S5.15 -155,-65 ; v1(-155,106) -155,-65 ; v1(205,-15) 155,-65 -155,-65
  Signal Layer Down w7: v1(606.85,26.11) 637.13,56.39 663.08,56.39 v1(665,58.31)
GND: C1.1 C2.1 C3.1 C4.1 C5.1 C7.2 C8.2 C9.1 D1.2 D2.2 REG1.3 RESET.1 S2.5 S3.6 S4.4 S5.2 U1.3 U1.5 U1.21 U2.7 U2.18 U2.21 U2.25 | length 2650.8
  Top Layer w7: v1(-415.1,55) -415.1,57.19 -403.32,68.98 S2.5 -331.98,68.98 -303.38,40.38 -303.38,-51.62 -306,-54.23 -306,-85.77 -285.77,-106 -203.73,-106 U1.21 ; v1(-370,355) -367,358 19.75,358 19.89,357.86 96.86,357.86 115.82,354.18 119.92,350.08 119.92,347.18 119.92,262.2 U1.5 97.97,240.97 79,222 79,190 92,177 123.81,177 U1.3 ; RESET.1 560,-62.03 v1(580,-82.03) ; D2.2 D1.2 793.74,330.74 v1(835,372) ; v1(934.98,320) C8.2 ; S5.2 1060.62,-149.38 1060.62,-95 C4.1
  Bottom Layer w7: v1(-164.77,314.67) -161.62,311.52 -161.62,251.97 U2.18 ; v1(-82.8,185.18) U2.21 ; U2.7 v1(-57.2,54.82) ; v1(19.57,185.18) U2.25 ; C7.2 v1(422.03,-9.45) ; C9.1 422.9,313.9 v1(440,331) ; C2.1 495,100 518.28,123.28 533.28,123.28 v1(560,150) ; v1(605,365) 605,361.09 615,351.09 C3.1 ; C1.1 833.9,282 834.45,282.55 C5.1 834.45,361.48 845,372.03 v1(874.45,372.03) ; v1(862,9.67) 862,46.53 890.55,75.08 REG1.3
NetC2_2: C2.2 X1.3 | length 861.1
  Top Layer w7: v1(308.29,225.82) 306.3,223.83 306.3,154.84 X1.3
  Signal Layer Top w7: v1(308.29,225.82) 337.37,254.9 337.37,266.56 375.81,305 565,305 632.85,237.15 632.85,-2.21 v1(610.06,-25)
  Bottom Layer w7: C2.2 593.08,-9.45 608.64,-25 v1(610.06,-25)
NetC3_2: C3.2 X1.2 | length 635.3
  Top Layer w7: v1(245,225) 247.42,227.42 247.42,265.46 256.19,274.23 256.19,327.44 X1.2
  Signal Layer Down w7: v1(245,225) 271,199 458,199 505,246 619,246 v1(660,205)
  Bottom Layer w7: C3.2 618.94,246.1 v1(660,205)
NetC6_2: C6.2 U2.2 | length 816
  Bottom Layer w7: U2.2 70.75,-76.75 105,-111 385,-111 449,-47 449,90 476.43,117.43 488.39,117.43 509,138.04 509,181 495,195 C6.2
NetD1_1: D1.1 R1.2 | length 424.9
  Top Layer w7: R1.2 693.27,256.73 705,245 715,245 755,205 755,136 765,126 826,126 840,140 840,250 860,270 D1.1
NetD2_1: D2.1 R3.1 | length 224.1
  Top Layer w7: R3.1 726.73,61 774.73,109 865.26,109 886.26,130 D2.1
NetD3_2: D3.2 R7.2 | length 154.7
  Top Layer w7: R7.2 691.54,-26.46 768,60 D3.2
NetD4_2: D4.2 R6.2 | length 838.4
  Top Layer w7: R6.2 692.28,165 674.28,183 466,183 454,171 454,113 475,92 598.96,92 660,30.96 660,-70 689,-99 764.74,-99 793.74,-70 D4.2
NetR6_1: R6.1 U2.22 | length 1023.5
  Top Layer w7: v1(483,149) 485.53,149 510.53,124 700.73,124 726.73,150 R6.1
  Bottom Layer w7: U2.22 -57.2,309.8 -9,358 71.74,358 72.78,359.04 170.66,359.04 271.01,258.69 271.01,196.99 319,149 v1(483,149)
NetR7_1: R7.1 U2.23 | length 1406.1
  Top Layer w7: v1(714,-73) 725,-62 R7.1
  Signal Layer Top w7: v1(36,124) 95,183 130,183 255,58 285,58 296,69 296,175 409,288 515,288 586,217 586,66.68 580.85,61.53 580.85,-32.56 621.29,-73 v1(714,-73)
  Bottom Layer w7: U2.23 -31.61,191.61 v1(36,124)
NetS2_2: S2.2 U2.16 | length 335.4
  Top Layer w7: S2.2 -323.27,145.75 -320.75,148.27 -311.6,148.27 -299.87,160 v1(-295,160)
  Signal Layer Top w7: v1(-295,160) -211,244 v1(-211,315)
  Bottom Layer w7: v1(-211,315) -210.75,314.75 U2.16
NetS2_3: S2.3 U2.15 | length 328.6
  Top Layer w7: v1(-415.48,113.95) -410.61,113.95 -404.4,120.16 S2.3
  Signal Layer Top w7: v1(-415.48,113.95) -414.95,114.47 -295.53,114.47 v1(-295,115)
  Bottom Layer w7: v1(-295,115) -236.34,173.66 U2.15
RESET: C6.1 R2.1 S3.5 S4.3 S5.3 U1.29 | length 2519.6
  Top Layer w7: U1.29 152.75,-20.48 162.75,-20.48 194.23,11 249,11 256.21,3.79 256.21,-1.34 265,-10.13 v1(265,-15)
  Signal Layer Top w7: v1(705,371.34) 708.44,367.9 708.44,354.69 717.13,346 886,346 910,370 S4.3 957,383 957,363 S3.5
  Signal Layer Down w7: v1(265,-15) 296.55,16.55 443.45,16.55 568.03,-108.03 818.03,-108.03 S5.3
  Bottom Layer w7: R2.1 237.72,35 245.04,27.67 245.04,4.96 v1(265,-15) ; C6.1 498.94,314.45 566.49,382 624.04,382 634.04,392 684.34,392 v1(705,371.34) ; S5.3 963,-147 963,-49 952,-38 952,268 963,279 963,377 S4.3
Rx: R4.1 U2.1 | length 471.3
  Bottom Layer w7: U2.1 96.34,-41.05 101.29,-46 291,-46 330,-7 330,30 302,58 262,58 260,60 246,60 236,70 236,110 R4.1
Tx: R5.1 U2.5 | length 394.5
  Bottom Layer w7: U2.5 -6.02,41.98 62,110 62,139 123,200 225,200 235,190 R5.1
VCC: REG1.1 S5.1 | length 625.9
  Signal Layer Top w7: v1(710,205) v1(710,205) 726.24,188.71 726.24,183.76 S5.1
  Bottom Layer w7: REG1.1 710,150.55 v1(710,205)
VUSB: C8.1 C9.2 D5.2 S2.1 | length 2737.2
  Top Layer w7: v1(-415.1,165.74) -410.23,165.74 -404.63,171.34 S2.1 ; v1(330,-85) 334.87,-85 344.87,-75 395,-75 418,-98 432.04,-98 473.04,-139 1043.62,-139 1043.62,-45 975,-45 952,-22 952,253 975,276 1076,276 1090,290 1090,320 C8.1
  Signal Layer Top w7: v1(330,-85) 330,140 v1(435,245)
  Signal Layer Down w7: v1(-415.1,165.74) -164.36,-85 v1(330,-85)
  Bottom Layer w7: C9.2 v1(435,245)
XTAL1: U1.7 X1.1 | length 911.1
  Top Layer w7: v1(-4,99) -4,174 -10.39,180.39 -10.39,210.83 54.16,275.38 U1.7 ; v1(304.42,350) 309.29,350 319.2,340.09 324.05,340.09 342.05,322.09 342.05,318.28 370.33,290 X1.1
  Signal Layer Top w7: v1(-4,99) -4,167.61 -10.39,174 -10.39,251.82 32.78,295 93.77,295 119,320.23 119,336.67 138.33,356 215.94,356 221.94,350 v1(304.42,350)
XTAL2: U1.8 X1.4 | length 213.5
  Top Layer w7: U1.8 50.65,326.54 75.91,326.54 81.22,331.86 v1(86.09,331.86) ; v1(162.92,330) 188.26,304.66 X1.4
  Signal Layer Down w7: v1(86.09,331.86) 87.02,330.93 161.99,330.93 v1(162.92,330)
pads on no net: REG1.4 RESET.2 S2. S2.4 U2.3 U2.6 U2.8 U2.9 U2.10 U2.11 U2.12 U2.13 U2.14 U2.19 U2.24 U2.26 U2.27 U2.28 X1.5

## Polygon pours and split planes (outlines as drawn)
+5 on VCC (split plane): 1154.9,-239.9 -534.9,-239.9 -534.9,469.9 1154.9,469.9
GND on GND (split plane): 1154.9,-239.9 -534.9,-239.9 -534.9,469.9 1154.9,469.9

## Keep-outs
Keep-Out Layer:
  the board outline again, w10

## Silkscreen, mask and mechanical layers (free items; w line width, h text height)
Top Overlay:
  text "By: Mahmoud Sameh" at -190,-495.01 h60
  text "Date: 24/9/2024" at -185,-625 h60